# Altium PCB ClubNIKA.PcbDoc (part 2 of 3)
Units mm, origin at the board's own origin, x right, y up, seen from the top; angles counter-clockwise.
Board outline 246.38 x 165.73 mm, 2 copper layers (Top Layer, Bottom Layer); 346 components, 273 nets, 1174 pads, 422 vias.
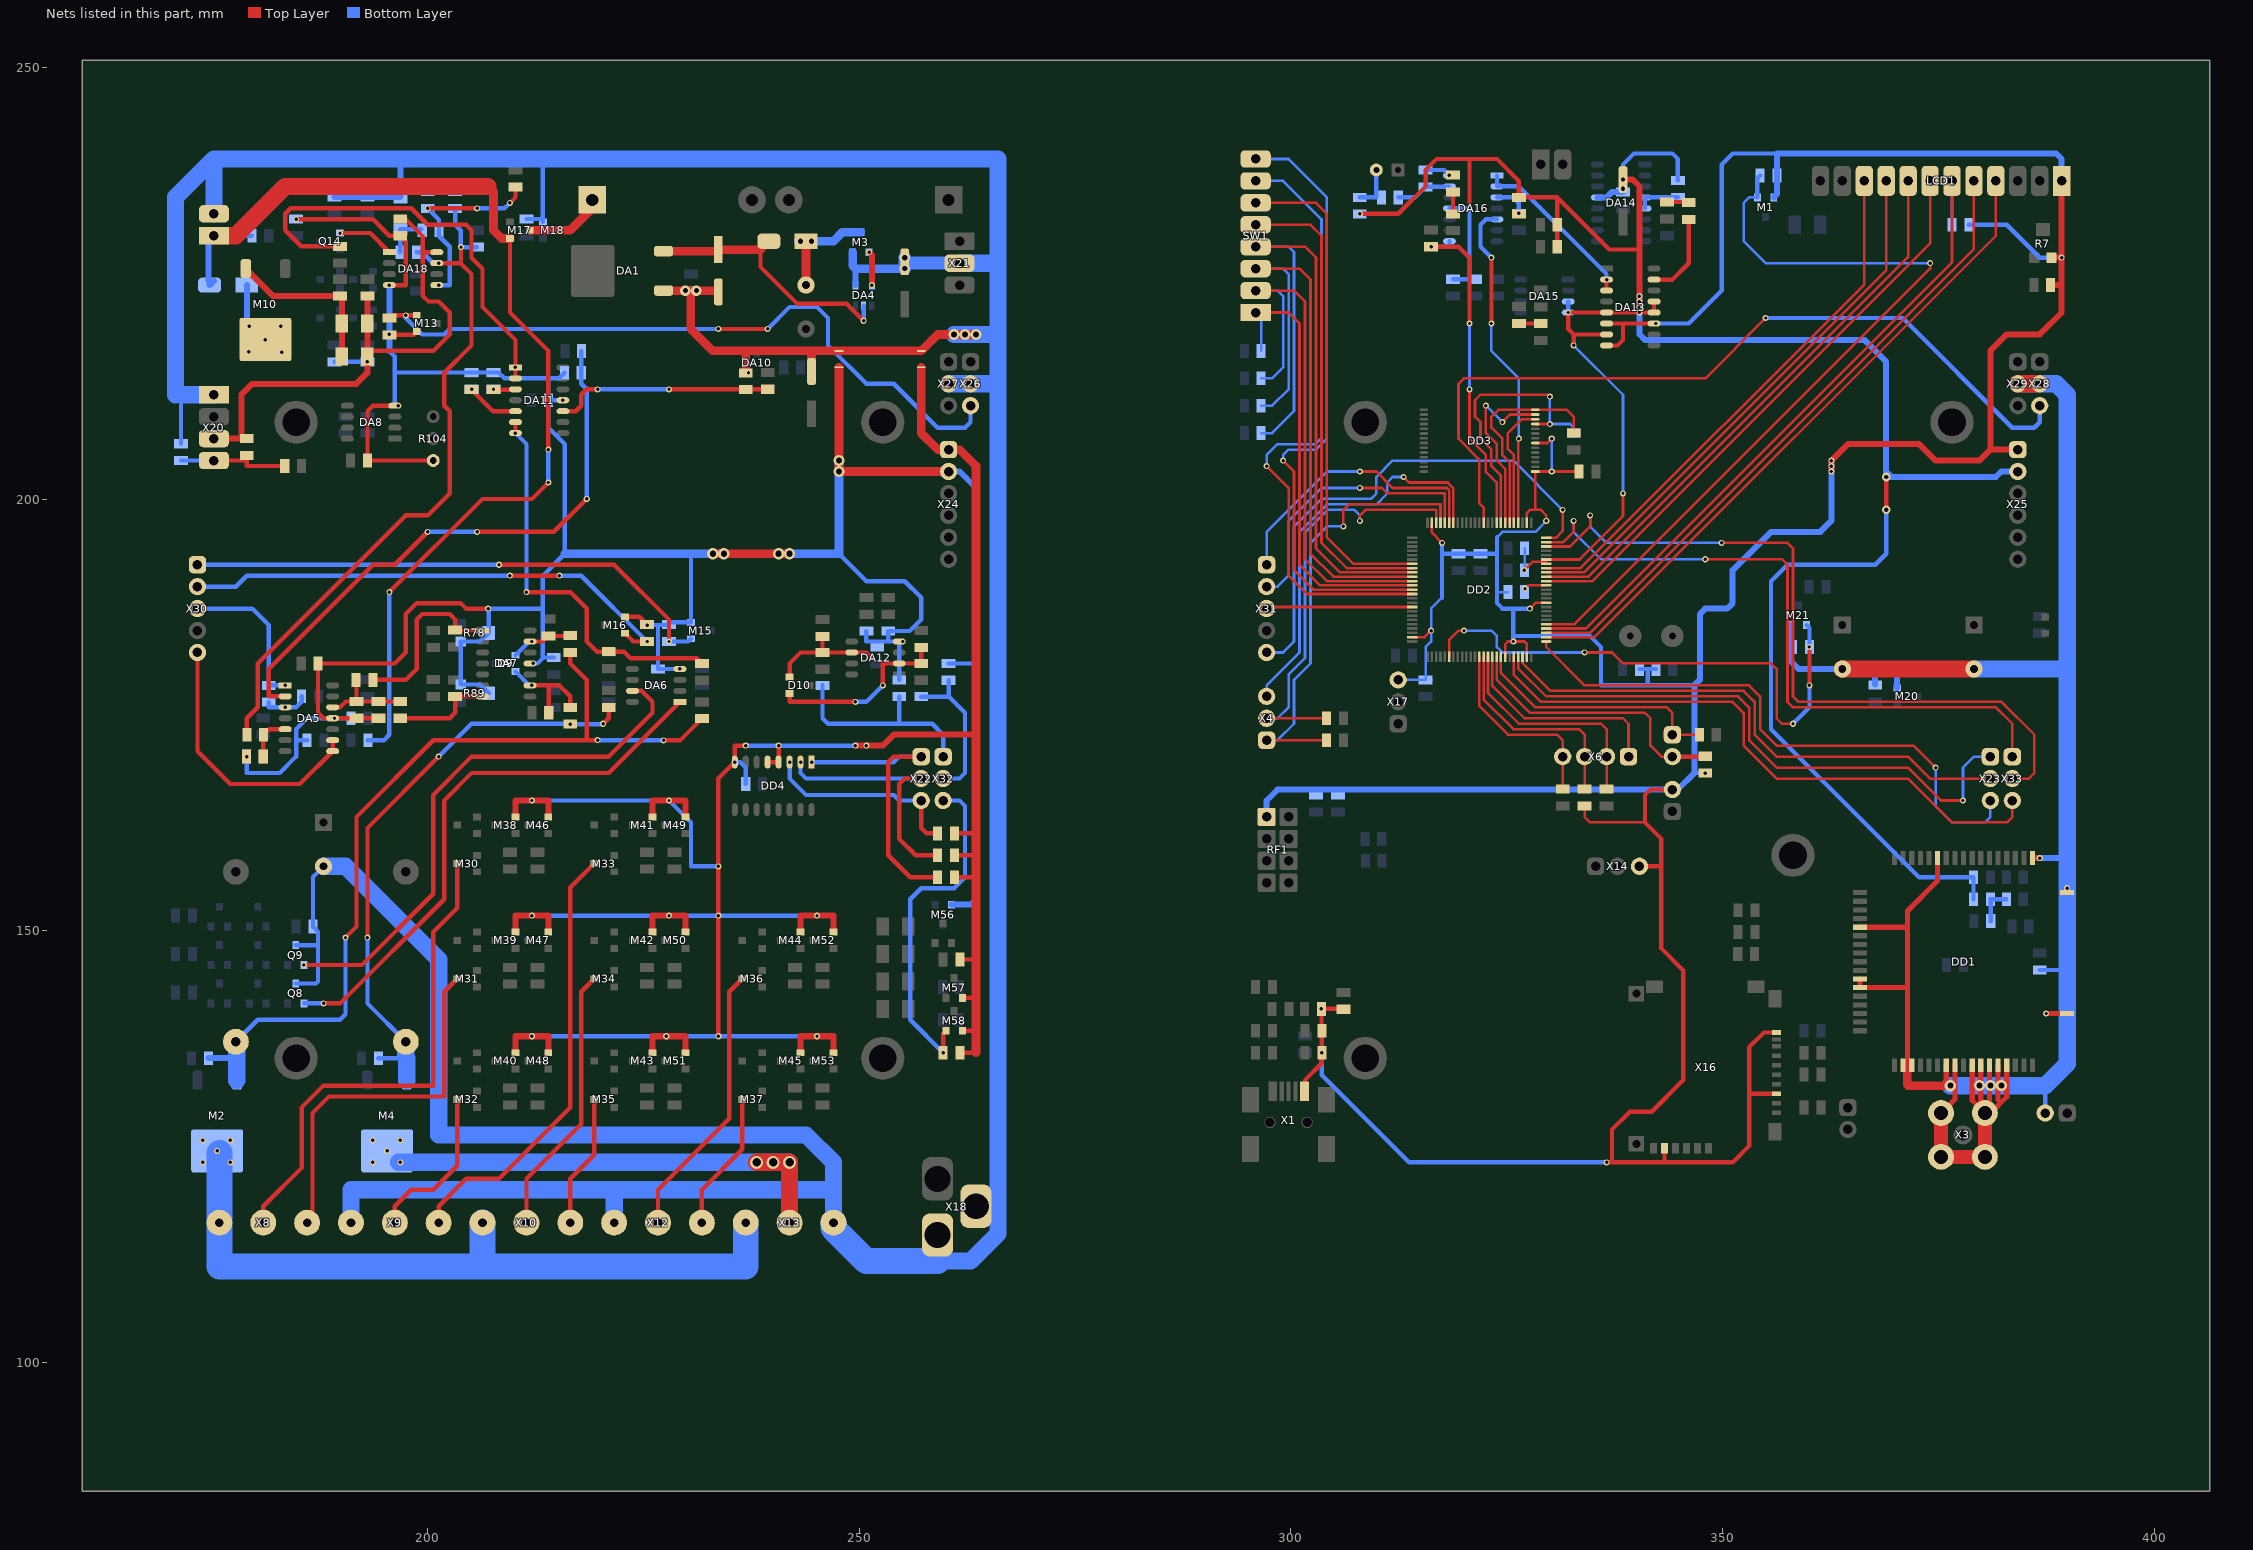
[diagram p2: the nets of this part, all layers, seen from the top]

## Via types
v1: diameter 0.7, hole 0.4, Top Layer to Bottom Layer, 390 vias
v2: diameter 1.3, hole 0.7, Top Layer to Bottom Layer, 15 vias
v3: diameter 1, hole 0.5, Top Layer to Bottom Layer, 6 vias
v4: diameter 1.2, hole 0.6, Top Layer to Bottom Layer, 6 vias
v5: diameter 1.5, hole 1, Top Layer to Bottom Layer, 3 vias
v6: diameter 1.4, hole 0.8, Top Layer to Bottom Layer, 2 vias

## Nets (pads, with @x,y where several pads share a name; then routed paths per layer and width w, separated by ;. In a path a pad name is that pad's centre, name@x,y a point inside that pad or via, vN(x,y) a via of type N, cw(c..) or ccw(c..) an arc to the next point about the centre after c; other vN are vias at no path point) (continued)
AGND_B1: C16.1 C19.1 C21.1 C22.1 C23.1 C27.1 C30.1 C31.1 C32.1 DA5.11 DA6.4 DA7.11 DA8.4 DA11.11 DA12.4 DA18.4 M13.2 M15.2 M16.2 M56.2 N1.2 R48.1 R53.1 R78.1 R78.3 R88.2 R89.2 R89.3 R90.2 R91.2 R103.2 R104.2 R107.1 R108.2 R117.2 R142.2 R144.2 R145.2 R178.2 R181.2 R215.2 X24.2 | length 373.5
  Top Layer w0.5: v1(184.785,232.41) 193.675,232.41 195.58,230.505 C19.1@196.85,230.505 197.485,229.87 197.485,224.79 DA18.4@195.948,224.79 ; C22.1@194.31,174.625 R53.1@191.77,174.625 DA5.11@189.015,174.625 187.96,174.625 187.325,175.26 C16.1@187.325,180.975 196.215,180.975 197.485,182.245 197.485,186.69 198.755,187.96 203.835,187.96 204.47,187.325 v1(207.01,187.325) ; R215.2@195.58,219.03 198.39,219.03 M13.2@198.755,219.395 ; DA8.4@196.215,210.82 193.675,210.82 193.04,210.185 C23.1@193.04,204.47 R104.2@200.66,204.47 ; M16.2@222.885,186.37 224.52,186.37 R91.2@225.425,185.465
  Top Layer w1: v2(233.045,193.675) v2(241.935,193.675) ; N1.2@247.65,215.265 v2(247.65,203.2) X24.2@260.35,203.2
  Bottom Layer w0.5: v1(179.07,170.18) 179.07,168.275 182.88,168.275 184.785,170.18 184.785,172.085 ; R107.1@186.055,172.085 184.785,172.085 ; R48.1@191.135,174.625 186.055,174.625 184.785,173.355 184.785,172.085 ; 195.58,217.17 196.215,216.535 196.215,210.83 ; 196.26,214.675 R142.2@205.105,214.675 R145.2@207.645,214.675 208.235,214.675 208.915,213.995 213.995,213.995 ; R89.3@207.085,177.53 206.085,178.53 R89.2@203.835,178.53 R78.1@203.835,183.515 206.085,183.515 R78.3@207.085,184.515 207.085,187.325 213.36,187.325 ; v1@212.247,180.975 212.725,180.975 213.36,181.61 213.36,191.135 215.9,193.675 215.9,206.375 213.995,208.28 C27.1@213.995,211.455 ; 213.405,181.655 R88.2@214.63,181.655 ; v1@215.628,211.455 C27.1@213.995,211.455 ; R144.2@215.855,214.63 215.22,213.995 213.995,213.995 ; v1(225.425,185.42) R90.2@227.965,185.42 ; 226.695,185.42 C21.1@226.695,180.34 v1(229.235,180.34) ; R90.2@228.235,185.735 M15.2@230.505,185.735 230.505,193.675 ; 247.65,193.675 250.825,190.5 255.27,190.5 257.175,188.595 257.175,186.055 255.86,184.74 R178.2@253.365,184.74 253.365,183.515 ; R181.2@250.825,184.74 250.825,183.515 253.365,183.515 ; C32.1@254.635,179.07 254.635,183.515 ; v1(255.02,183.515) 254.635,183.515 ; C31.1@260.35,180.975 263.525,180.975 ; C27.1@213.995,211.455 213.995,213.995 ; 253.365,183.515 254.635,183.515
  Bottom Layer w0.7: 195.58,217.17 v1(195.58,219.075) v1(195.58,224.79) ; X24.2@260.35,203.2 261.62,203.2 263.525,201.295 263.525,180.975 263.525,153.67 262.89,153.035 M56.2@260.665,153.035
  Bottom Layer w1: 215.9,193.675 230.505,193.675 v2(234.315,193.675) ; v2(240.665,193.675) 247.65,193.675 v2(247.65,204.47)
  other v1: 189.23,174.625 212.247,180.983 196.591,210.821 215.685,211.455
AGND_B2: C8.2 C9.2 C18.1 C34.2 C35.1 C36.2 C38.2 C40.1 C41.1 C45.1 DA13.5 DA13.7 DA13.12 DA13.13 DA14.13 DA15.3 DA15.4 DA16.11 DD2.19 DD2.20 R188.2 R202.2 R206.2 X25.2 | length 295.1
  Top Layer w0.3: v1(327.025,191.77) 328.02,192.765 329.565,192.765 ; DD2.20@329.565,193.015 333.422,193.015 338.455,198.048 v1(338.455,200.66)
  Top Layer w0.5: v1(307.975,233.045) 312.42,233.045 315.595,236.22 315.595,238.125 316.865,239.395 320.675,239.395 ; v1(320.675,233.68) 320.675,239.395 ; C40.1@330.835,229.235 C41.1@330.835,231.775 330.835,234.95 ; v1(332.74,217.805) 332.74,219.075 ; DA13.7@336.55,219.075 332.74,219.075 ; 340.36,228.917 336.868,228.917 330.835,234.95 ; DA13.13@342.05,222.885 DA13.12@342.05,221.615 v1(340.36,221.615) DA13.5@336.55,221.615 v1(332.105,221.615) 332.105,219.71 332.74,219.075 ; v3(368.935,198.755) v3(368.935,202.565) ; 320.675,239.395 323.85,239.395 326.39,236.855 C45.1@326.39,234.95 330.835,234.95
  Top Layer w0.7: v3(338.455,237.01) 339.57,237.01 340.36,236.22 340.36,228.917 v1(340.36,221.615)
  Bottom Layer w0.3: C8.2@327.07,191.815 C9.2@327.07,194.31 ; v1(332.74,217.805) 338.455,212.09 v1(338.455,200.66)
  Bottom Layer w0.5: DA16.11@318.35,233.68 v1(320.675,233.68) R202.2@320.675,225.47 ; C18.1@318.77,225.47 R202.2@320.675,225.47 ; R202.2@320.675,225.425 R202.2@320.675,225.47 ; v1(332.105,221.615) DA15.3@332.105,222.885 ; v3(338.455,237.01) 338.455,238.76 339.725,240.03 344.17,240.03 344.805,239.395 C36.2@344.805,236.9 ; v3(368.935,198.755) 368.935,193.675 367.665,192.405 357.505,192.405 355.6,190.5 355.6,173.355 372.745,156.21 C38.2@379.05,156.21 R188.2@379.05,153.67
  Bottom Layer w0.7: DA14.13@335.495,234.95 336.55,234.95 337.185,235.585 C35.1@338.455,235.585 v3(338.455,237.01) ; v1(340.36,223.52) v1(340.36,222.885) v1(340.36,222.25) v1(340.36,221.615) 340.36,219.075 340.995,218.44 366.395,218.44 368.935,215.9 368.935,203.2 ; X25.2@384.175,203.2 382.27,203.2 381.635,202.565 369.57,202.565 ; 368.935,203.2 v3(368.935,202.565) 369.57,202.565 ; 368.935,203.2 369.57,202.565
  other v3: 338.454,235.947
BAT_CHARGE_B1: M13.1 R215.1 X26.3 | length 80.9
  Top Layer w0.5: R215.1@195.58,220.98 195.895,221.295 v1(197.485,221.295) M13.1@198.755,221.295 ; v1(233.68,219.71) v1(239.395,219.71)
  Bottom Layer w0.5: v1(197.485,221.295) 197.485,220.98 199.39,219.075 201.93,219.075 202.565,219.71 v1(233.68,219.71) ; v1(239.395,219.71) 241.935,222.25 245.11,222.25 246.38,220.98 246.38,217.805 250.825,213.36 254,213.36 259.08,208.28 262.255,208.28 262.89,208.915 X26.3@262.89,210.82
BAT_CHARGE_B2: DD2.37 X28.3 | length 95.2
  Top Layer w0.3: DD2.37@322.315,197.265 322.315,199.02 321.797,199.538 321.797,204.618 319.405,207.01 319.405,213.36 320.04,213.995 347.98,213.995 v1(354.965,220.98)
  Bottom Layer w0.5: v1(354.965,220.98) 370.84,220.98 383.54,208.28 386.08,208.28 386.715,208.915 X28.3@386.715,210.82
BAT_SOCK_CMP_IN: DA18.5 R94.2 R95.2 R96.1 | length 23.2
  Top Layer w0.5: v1(200.025,233.68) v1(205.74,233.68) ; v1(209.55,234.315) 210.185,234.95 R94.2@210.185,236.175
  Bottom Layer w0.5: v1(200.025,233.68) 201.34,232.365 R95.2@201.34,231.14 201.295,231.095 201.295,230.505 202.565,229.235 202.565,224.79 v1(201.295,224.79) ; v1(205.74,233.68) 208.915,233.68 v1(209.55,234.315)
BAT_SOCK_CMP_OUT: DA18.7 R92.2 R93.1 R97.1 R102.1 | length 82.2
  Top Layer w0.5: R102.1@179.07,172.72 179.07,174.625 180.34,175.895 180.34,180.975 197.485,198.12 200.025,198.12 202.565,200.66 202.565,210.185 201.93,210.82 201.93,214.63 205.105,217.805 205.105,226.06 203.835,227.33 ; DA18.7@201.08,227.33 v1(201.295,227.33) 203.835,227.33 ; v1(203.88,229.19) 203.88,227.375 203.835,227.33
  Bottom Layer w0.5: R93.1@198.755,228.6 199.39,228.6 200.66,227.33 v1(201.295,227.33) ; R97.1@203.2,233.68 203.2,231.775 203.835,231.14 v1@203.835,229.19 ; v1(203.88,229.19) R92.2@205.74,229.19
BAT_VOLT_B1: DA5.8 DA5.9 X30.5 | length 31.5
  Top Layer w0.5: X30.5@173.355,182.245 173.355,170.815 177.165,167.005 185.205,167.005 DA5.8@189.015,170.815 DA5.9@189.015,172.085
BAT_VOLT_B2: DD2.25 X31.5 | length 59.5
  Top Layer w0.3: DD2.25@329.565,195.515 330.698,195.515 331.47,196.287 v1(331.47,198.755)
  Bottom Layer w0.3: X31.5@297.18,182.245 299.085,182.245 300.355,183.515 300.355,196.85 303.53,200.025 309.245,200.025 309.88,200.66 309.88,202.565 311.785,204.47 325.755,204.47 v1(331.47,198.755)
BATTERY: D5.2 M17.2 R100.2 R101.2 X19.1 | length 125.1
  Top Layer w0.5: v1(195.58,189.23) 206.375,200.025 212.09,200.025 v1(213.995,201.93) ; M17.2@209.55,230.19 209.55,221.615 213.995,217.17 v1(213.995,205.74)
  Top Layer w1: 207.01,236.22 207.645,235.585 207.645,231.14 208.595,230.19 M17.2@209.55,230.19
  Top Layer w2: X19.1@175.26,230.505 177.8,230.505 183.515,236.22 207.01,236.22
  Bottom Layer w0.5: X19.1@175.26,230.505 R101.2@179.66,230.505 ; R100.2@193.085,172.085 194.945,172.085 195.58,172.72 v1(195.58,189.23) ; v1(213.995,201.93) v1(213.995,205.74)
  Bottom Layer w0.7: D5.2@174.625,225.28 X19.1@174.625,230.505 ; D5.2@174.77,224.79 D5.2@175.26,225.28
CH1_IN: M30.3 X8.2 | length 58.3
  Top Layer w0.5: X8.2@180.975,116.205 180.975,118.11 185.42,122.555 185.42,129.54 187.96,132.08 200.66,132.08 200.66,149.86 203.44,152.64 M30.3@203.44,157.795
CH2_IN: M31.3 X8.3 | length 43.3
  Top Layer w0.5: X8.3@186.055,116.205 186.69,116.84 186.69,128.905 188.595,130.81 201.93,130.81 201.93,142.95 M31.3@203.44,144.46
CH3_IN: M32.3 X9.2 | length 18.8
  Top Layer w0.5: X9.2@196.215,116.205 196.215,118.11 198.12,120.015 200.66,120.015 203.44,122.795 M32.3@203.44,130.49
CH4_IN: M33.3 X9.3 | length 51.3
  Top Layer w0.5: X9.3@201.295,116.205 201.295,118.11 204.47,121.285 208.28,121.285 216.535,129.54 216.535,155.015 M33.3@219.315,157.795
CH5_IN: M34.3 X10.2 | length 31.5
  Top Layer w0.5: X10.2@211.455,116.205 211.455,121.285 217.805,127.635 217.805,142.95 M34.3@219.315,144.46
CH6_IN: M35.3 X10.3 | length 15.4
  Top Layer w0.5: X10.3@216.535,116.205 216.535,121.285 219.315,124.065 M35.3@219.315,130.49
CH7_IN: M36.3 X12.2 | length 32.3
  Top Layer w0.5: X12.2@226.695,116.205 226.695,120.015 234.95,128.27 234.95,142.95 M36.3@236.46,144.46
CH8_IN: M37.3 X12.3 | length 16.2
  Top Layer w0.5: X12.3@231.775,116.205 231.775,120.015 236.46,124.7 M37.3@236.46,130.49
CH_CUR_SINK_B1: C31.2 R182.2 X32.2 | length 17.5
  Bottom Layer w0.5: R182.2@257.175,177.12 260.395,177.12 262.255,175.26 262.255,168.275 261.62,167.64 X32.2@259.715,167.64 ; 260.35,177.165 C31.2@260.35,179.025
CH_CUR_SINK_B2: DD2.23 X33.2 | length 87.3
  Top Layer w0.3: DD2.23@329.565,194.515 332.31,194.515 334.645,196.85 v1(334.645,198.12) ; v1(349.885,194.945) 357.505,194.945 358.14,194.31 358.14,177.165 358.775,176.53 382.27,176.53 386.08,172.72 386.08,168.275 385.445,167.64 X33.2@383.54,167.64
  Bottom Layer w0.3: v1(334.645,198.12) 334.645,196.85 336.55,194.945 v1(349.885,194.945)
CH_CUR_SRC_B1: C32.2 R183.1 X32.1 | length 24.2
  Bottom Layer w0.5: R183.1@245.745,178.435 245.745,174.625 246.38,173.99 254.635,173.99 ; C32.2@254.635,177.12 254.635,173.99 ; X32.1@259.715,170.18 259.715,172.72 258.445,173.99 254.635,173.99
CH_CUR_SRC_B2: DD2.24 X33.1 | length 79.3
  Top Layer w0.3: DD2.24@329.565,195.015 331.54,195.015 332.74,196.215 v1(332.74,197.485) ; v1(347.98,193.04) 356.87,193.04 357.505,192.405 357.505,176.53 358.14,175.895 381.635,175.895 383.54,173.99 X33.1@383.54,170.18
  Bottom Layer w0.3: v1(332.74,197.485) 332.74,196.215 335.915,193.04 v1(347.98,193.04)
CH_DIR_B1: M58.1 R180.1 X32.3 | length 40.5
  Top Layer w0.5: v1(259.715,135.89) 259.715,138.11 M58.1@260.035,138.43
  Bottom Layer w0.5: v1(259.715,135.89) 255.905,139.7 255.905,153.67 257.175,154.94 260.985,154.94 262.255,156.21 262.255,164.465 261.62,165.1 X32.3@259.715,165.1
CH_DIR_B2: DD2.96 X33.3 | length 71.3
  Top Layer w0.3: DD2.96@325.815,181.765 325.815,179.645 328.93,176.53 351.155,176.53 352.425,175.26 352.425,171.45 356.235,167.64 371.475,167.64 376.555,162.56 382.905,162.56 383.54,163.195 X33.3@383.54,165.1
CH_SEL0_B1: DD4.1 R163.1 X22.1 | length 34.6
  Top Layer w0.5: X22.1@257.175,170.18 254,170.18 253.365,169.545 253.365,158.75 255.905,156.21 R163.1@259.08,156.21
  Bottom Layer w0.5: v1(244.475,169.545) 254,169.545 254.635,170.18 X22.1@257.175,170.18
CH_SEL0_B2: DD2.97 X23.1 | length 68.9
  Top Layer w0.3: DD2.97@326.315,181.765 326.315,180.415 329.565,177.165 351.79,177.165 353.06,175.895 353.06,172.085 356.235,168.91 371.475,168.91 375.285,165.1 v1(377.825,165.1)
  Bottom Layer w0.3: v1(377.825,165.1) 377.825,168.91 379.095,170.18 X23.1@381,170.18
CH_SEL1_B1: DD4.2 R164.1 X22.2 | length 29.9
  Top Layer w0.5: X22.2@257.175,167.64 255.27,167.64 254.635,167.005 254.635,160.655 256.54,158.75 R164.1@259.08,158.75
  Bottom Layer w0.5: v1(243.205,169.545) 243.205,168.275 243.84,167.64 X22.2@257.175,167.64
CH_SEL1_B2: DD2.98 X23.2 | length 62.7
  Top Layer w0.3: DD2.98@326.815,181.765 326.815,181.02 330.035,177.8 352.425,177.8 353.695,176.53 353.695,172.72 356.235,170.18 371.475,170.18 374.015,167.64 X23.2@381,167.64
CH_SEL2_B1: DD4.3 R165.1 X22.3 | length 23.5
  Top Layer w0.5: X22.3@257.175,165.1 257.175,161.925 257.81,161.29 R165.1@259.08,161.29
  Bottom Layer w0.5: v1(241.935,169.545) 241.935,167.64 243.84,165.735 254,165.735 254.635,165.1 X22.3@257.175,165.1
CH_SEL2_B2: DD2.1 X23.3 | length 67.5
  Top Layer w0.3: DD2.1@329.565,183.515 329.565,182.88 334.01,178.435 353.06,178.435 354.33,177.165 354.33,173.355 356.235,171.45 372.11,171.45 v1(374.65,168.91)
  Bottom Layer w0.3: v1(374.65,168.91) 374.65,164.465 376.555,162.56 380.365,162.56 381,163.195 X23.3@381,165.1
CHG_I: DA11.3 R137.2 R145.1 | length 2.5
  Top Layer w0.5: R137.2@207.645,212.68 DA11.3@210.14,212.68
  other v1: 207.645,212.725
CHG_I_BUF: DA11.1 DA11.2 R214.2 | length 51.2
  Top Layer w0.5: R214.2@189.865,229.28 185.375,229.28 183.515,231.14 183.515,233.045 184.15,233.68 198.12,233.68 200.025,231.775 204.47,231.775 205.105,231.14 205.105,227.965 206.375,226.695 206.375,222.25 210.185,218.44 v1(210.185,215.265) DA11.2@210.185,213.995
CHG_I_CTR: DA18.1 Q14.1 | length 6.6
  Top Layer w0.5: v1(189.865,230.82) 193.36,230.82 DA18.1@195.58,228.6
CHG_I_MSR_MN: M10.2 R70.2 R84.2 R212.1 | length 19.3
  Top Layer w0.7: M10.2@178.955,226.695 182.13,223.52 R212.1@189.865,223.52 190.09,223.295 R84.2@190.09,220.345 R70.2@190.09,216.535
CHG_V: C19.2 DA18.8 R70.1 R72.1 R73.1 R84.1 R110.1 R211.1 X20.3 | length 64.1
  Top Layer w0.5: R70.1@193.04,217.17 200.66,217.17 202.565,219.075 202.565,221.615 201.295,222.885 200.115,222.885 199.435,223.565 199.435,228.6 ; C19.2@196.85,232.455 197.44,232.455 199.435,230.46 199.435,228.6 ; DA18.8@201.08,228.6 199.435,228.6
  Top Layer w0.7: X20.3@175.26,207.01 178.435,207.01 178.435,212.09 179.705,213.36 191.77,213.36 193.04,214.63 v1(193.04,215.9) R70.1@193.04,216.535 ; R70.1@193.04,217.17 R84.1@193.04,220.345 R211.1@193.04,223.52
  Bottom Layer w0.5: R73.1@189.23,215.9 R72.1@192.405,215.9
CHG_V_ADJ: R110.2 R111.2 R120.1 X20.4 | length 13.8
  Top Layer w0.5: X20.4@175.26,204.47 179.07,204.47 R110.2@179.07,205.06 179.07,203.835 R111.2@183.47,203.835
  Bottom Layer w0.5: R120.1@171.45,204.47 X20.4@175.26,204.47
DCHG_SIM900_CAP: DD2.81 M21.1 R127.1 | length 63.1
  Top Layer w0.3: DD2.81@318.315,181.765 318.315,183.695 319.392,184.772 v1(320.04,184.772) ; v1(334.01,182.245) 337.185,182.245 338.455,180.975 355.6,180.975 356.235,180.34 356.235,174.625 356.87,173.99 v1(358.14,173.99)
  Top Layer w0.5: v1(360.045,178.435) v1(360.045,182.88)
  Bottom Layer w0.3: v1(320.04,184.772) 323.228,184.772 323.85,184.15 323.85,182.88 324.485,182.245 v1(334.01,182.245)
  Bottom Layer w0.5: v1(358.14,173.99) 360.045,175.895 v1(360.045,178.435) ; M21.1@359.725,185.42 360.045,185.1 v1(360.045,182.88)
DGND_B1: C29.1 DD4.4 DD4.5 DD4.8 M38.2 M39.2 M40.2 M41.2 M42.2 M43.2 M44.2 M45.2 M46.2 M47.2 M48.2 M49.2 M50.2 M51.2 M52.2 M53.2 M57.2 M58.2 N2.2 R163.2 R164.2 R165.2 R175.2 R180.2 X24.1 | length 322.8
  Top Layer w0.5: v1(233.68,137.795) v1(233.68,151.765) v1(233.68,157.48) 233.68,167.64 DD4.8@235.392,169.352 ; DD4.8@235.585,169.942 235.585,171.45 v1(236.855,171.45) ; DD4.5@239.395,169.545 DD4.4@240.665,169.545 v1(240.665,171.45) ; R163.2@261.03,156.21 263.525,156.21 ; R164.2@261.03,158.75 263.525,158.75 ; R165.2@261.03,161.29 263.525,161.29 ; R180.2@261.665,135.89 263.525,135.89 ; R175.2@261.665,146.685 263.525,146.685 ; M58.2@261.935,138.43 263.525,138.43 ; M57.2@261.935,142.24 263.525,142.24
  Top Layer w0.7: M40.2@210.185,135.885 210.185,137.795 213.995,137.795 M48.2@213.995,135.885 ; M39.2@210.185,149.855 210.185,151.765 v1(212.09,151.765) 213.995,151.765 M47.2@213.995,149.855 ; M38.2@210.185,163.19 210.185,165.1 v1(212.09,165.1) 213.995,165.1 M46.2@213.995,163.19 ; M43.2@226.06,135.885 226.06,137.795 229.87,137.795 M51.2@229.87,135.885 ; M42.2@226.06,149.855 226.06,151.765 v1(227.965,151.765) 229.87,151.765 M50.2@229.87,149.855 ; M41.2@226.06,163.19 226.06,165.1 v1(227.965,165.1) 229.87,165.1 M49.2@229.87,163.19 ; M45.2@243.205,135.885 243.205,137.795 247.015,137.795 M53.2@247.015,135.885 ; M44.2@243.205,149.855 243.205,151.765 v1(245.11,151.765) 247.015,151.765 M52.2@247.015,149.855 ; v1(249.555,171.45) v1(250.825,171.45) 252.73,171.45 254,172.72 263.525,172.72
  Top Layer w1: N2.2@257.175,215.265 257.175,207.645 259.08,205.74 X24.1@260.35,205.74 261.62,205.74 263.525,203.835 263.525,172.72 263.525,161.29 263.525,158.75 263.525,156.21 263.525,146.685 263.525,142.24 263.525,138.43 263.525,135.89
  Bottom Layer w0.5: v1(212.09,137.795) v1(245.11,137.795) ; v1(212.09,151.765) v1(227.965,151.765) v1(245.11,151.765) ; v1(212.09,165.1) v1(227.965,165.1) 230.505,162.56 230.505,157.48 v1(233.68,157.48) ; v1(235.584,169.545) 236.22,169.545 236.855,168.91 C29.1@236.855,167.005 ; v1(236.855,171.45) v1(240.665,171.45) v1(250.825,171.45)
  other v1: 227.647,137.795
DGND_B2: C1.1 C2.1 C3.1 C4.1 C5.1 C6.1 C7.1 C10.1 C11.1 C12.1 C20.1 DA13.6 DA13.8 DA13.11 DD2.10 DD2.27 DD2.49 DD2.74 DD2.94 DD2.99 DD3.1 DD3.7 LCD1.GND M1.2 R7.2 R8.2 R9.2 R10.2 R11.2 R12.2 R19.1 R20.1 R32.1 RF1.1 X1.GND X11.2 X14.3 X16.SD_GND X16.SD_PRES1 X16.SIM_GND X17.3 X25.1 | length 525.7
  Top Layer w0.3: DD2.74@314.065,184.015 315.46,184.015 v1(316.23,184.785) ; DD2.49@316.315,197.265 316.315,196.13 v1(317.5,194.945) ; DD2.94@324.815,181.765 324.815,183.21 325.12,183.515 v1(325.755,183.515) 327.025,183.515 327.315,183.225 DD2.99@327.315,181.765 ; DD2.27@327.315,197.265 327.315,198.41 327.66,198.755 328.295,198.755 ; v1(327.66,187.325) 328.35,188.015 DD2.10@329.565,188.015 ; DD3.7@328.295,206.5 329.69,206.5 v1(330.2,207.01) ; v1(329.565,197.485) 329.565,198.12 328.93,198.755 328.295,198.755 ; C10.1@333.375,203.2 v1(330.2,203.2) DD3.1@328.295,203.2 328.295,198.755 ; R20.1@334.01,164.465 334.01,163.195 334.645,162.56 340.995,162.56
  Top Layer w0.5: X1.GND@301.57,131.445 301.625,131.5 301.625,132.715 303.575,134.665 v1(303.575,135.89) R10.2@303.575,138.43 ; R10.2@303.53,138.475 v1(303.53,140.97) R9.2@306.025,140.97 ; v1(336.55,123.19) 337.185,123.19 ; DA13.8@336.55,217.805 337.82,217.805 338.455,218.44 338.455,220.345 ; DA13.6@336.55,220.345 338.455,220.345 ; X14.3@340.36,157.48 342.9,157.48 ; DA13.11@342.05,220.345 338.455,220.345 ; X16.SIM_GND@343.255,124.83 343.255,123.47 343.535,123.19 ; X11.2@344.17,166.37 341.63,166.37 340.995,165.735 340.995,162.56 342.9,160.655 342.9,157.48 ; 353.06,131.445 353.375,131.13 X16.SD_GND@356.235,131.13 ; X16.SD_PRES1@356.235,138.23 354.765,138.23 353.06,136.525 353.06,125.095 351.155,123.19 343.535,123.19 ; 337.185,123.19 343.535,123.19 ; 337.185,123.19 337.185,127 339.249,129.064 341.789,129.064 345.44,132.715 345.44,145.415 342.9,147.955 342.9,157.48
  Top Layer w0.7: v1(362.585,203.2) v1(362.585,204.47) 364.49,206.375 372.745,206.375 374.65,204.47 379.73,204.47 381,205.74 ; X25.1@384.175,205.74 381,205.74 ; C1.1@387.985,224.79 389.255,224.79 ; R7.2@388.08,227.965 v1(389.255,227.965) ; LCD1.GND@389.255,236.855 v1(389.255,227.965) ; 381,205.74 381,217.17 382.905,219.075 386.715,219.075 389.255,221.615 389.255,224.79 ; 389.255,224.79 v1(389.255,227.965)
  Bottom Layer w0.3: X17.3@312.42,179.07 R32.1@315.595,179.07 315.595,182.88 316.23,183.515 v1(316.23,184.785) 316.23,187.325 317.5,188.595 ; 323.85,189.23 C7.1@325.12,189.23 ; 323.85,195.58 324.485,196.215 328.295,196.215 v1(329.565,197.485) ; v1(330.2,203.2) v1(330.2,207.01)
  Bottom Layer w0.5: v1(303.575,135.89) 303.575,133.305 313.69,123.19 v1(336.55,123.19) ; 317.5,188.595 v1(317.5,194.945) ; 317.5,193.675 323.85,193.675 ; 323.85,195.58 323.85,193.675 ; v1(325.755,183.515) 325.755,187.325 ; 325.755,184.15 334.645,184.15 335.915,182.88 335.915,178.435 341.312,178.435 ; v1(327.66,187.325) 325.755,187.325 ; C5.1@340.36,180.34 341.312,180.34 ; C6.1@342.265,180.34 341.312,180.34 ; v1(342.265,220.345) 346.075,220.345 349.885,224.155 349.885,238.76 351.155,240.03 356.28,240.03 ; X11.2@344.17,166.37 X11.2@344.805,166.37 ; 346.71,168.275 v1(347.98,168.275) ; 346.71,178.435 341.312,178.435 ; R8.2@378.505,231.775 382.905,231.775 386.715,227.965 v1(389.255,227.965) ; 323.85,193.675 323.85,189.23 323.85,187.96 324.485,187.325 325.755,187.325 ; 341.312,178.435 341.312,180.34
  Bottom Layer w0.7: RF1.1@297.18,163.195 297.18,165.1 298.45,166.37 X11.2@344.17,166.37 ; X11.2@344.805,166.37 346.71,168.275 346.71,178.435 347.345,179.07 347.345,186.69 347.98,187.325 350.52,187.325 351.155,187.96 351.155,191.77 355.6,196.215 361.315,196.215 362.585,197.485 v1(362.585,204.47) ; M1.2@355.915,234.95 356.28,235.315 R12.2@356.28,237.49 356.28,240.03 388.62,240.03 389.255,239.395 LCD1.GND@389.255,236.855
  other v1: 362.585,203.835
EXT1_I_CTR: DA6.1 Q8.1 | length 64.7
  Top Layer w0.5: v1(187.96,141.605) 189.865,141.605 201.93,153.67 201.93,165.1 205.105,168.275 220.98,168.275 DA6.1@229.235,176.53
  Bottom Layer w0.5: Q8.1@185.69,141.605 v1(187.96,141.605)
EXT1_I_MSR: DA7.1 R55.1 R77.2 | length 20.7
  Top Layer w0.5: R55.1@193.675,179.07 197.485,179.07 198.755,180.34 198.755,186.055 199.39,186.69 202.565,186.69 203.2,186.055 R77.2@203.2,184.83 ; R77.2@203.2,184.785 DA7.1@206.375,184.785
EXT1_I_MSR_MN: M2.2 R44.1 R45.1 R67.2 R79.1 | length 100.7
  Top Layer w0.5: v1(190.5,149.225) 191.77,150.495 191.77,163.195 200.66,172.085 218.44,172.085 ; R79.1@216.535,182.245 216.535,180.975 218.44,179.07 218.44,172.085 ; v1(219.71,172.085) 218.44,172.085 ; v1(227.352,172.063) 229.258,172.063 R67.2@231.775,174.58
  Bottom Layer w0.5: R44.1@177.8,137.16 180.34,139.7 189.865,139.7 190.5,140.335 v1(190.5,149.225) ; v1(219.71,172.085) 219.732,172.063 v1(227.352,172.063)
  Bottom Layer w0.7: R45.1@174.625,135.255 177.915,135.255
  Bottom Layer w2: M2.2@177.915,132.715 177.915,135.255 R44.1@177.915,137.045
EXT2_I_CTR: DA6.7 Q9.1 | length 63.3
  Top Layer w0.5: v1(185.69,146.05) 192.405,146.05 200.66,154.305 200.66,165.735 205.105,170.18 220.98,170.18 226.06,175.26 226.06,176.53 224.79,177.8 DA6.7@223.735,177.8
EXT2_I_MSR: DA7.7 R52.1 R112.2 | length 11.6
  Top Layer w0.5: R52.1@196.85,174.625 202.565,174.625 203.2,175.26 R112.2@203.2,177.12 ; R112.2@203.2,177.165 DA7.7@206.375,177.165
EXT2_I_MSR_MN: M4.2 R51.1 R54.1 R58.2 R105.2 | length 68.9
  Top Layer w0.5: v1(193.04,149.225) 193.04,161.925 v1(201.295,170.18) ; v1(220.345,173.99) 220.98,174.625 R58.2@220.98,175.895
  Bottom Layer w0.5: v1(193.04,149.225) 193.04,141.605 R51.1@197.485,137.16 ; R54.1@194.31,135.255 197.6,135.255 ; v1(201.295,170.18) 205.105,173.99 v1@216.535,173.99 ; v1(216.535,173.945) v1@220.345,173.945
  Bottom Layer w2: R51.1@197.485,137.16 197.485,135.37 197.6,135.255 M4.2@197.6,132.715
EXT_12V_CH1: M2.3 X8.1 X10.1 X13.1 | length 84.3
  Bottom Layer w3: M2.3@175.895,124.255 X8.1@175.895,116.205 175.895,111.125 206.375,111.125 ; X10.1@206.375,116.205 206.375,111.125 ; X13.1@236.855,116.205 236.855,111.125 206.375,111.125
  other v1: 173.99,123.19 177.165,123.19 175.635,124.515 173.99,125.73 177.165,125.73
EXT_12V_CH1_KEY_B1: M15.1 R90.1 X30.1 | length 62.5
  Top Layer w0.5: v1(208.28,192.405) 221.615,192.405 227.965,186.055 v1(227.965,183.515)
  Bottom Layer w0.5: X30.1@173.355,192.405 v1(208.28,192.405) ; v1(227.965,183.515) 230.185,183.515 M15.1@230.505,183.835
EXT_12V_CH1_KEY_B2: DD2.45 X31.1 | length 32.5
  Top Layer w0.3: v1(307.975,203.2) 309.88,203.2 311.785,201.295 318.063,201.295 318.315,201.043 DD2.45@318.315,197.265
  Bottom Layer w0.3: X31.1@297.18,192.405 297.18,196.215 304.165,203.2 v1(307.975,203.2)
EXT_12V_CH2: M4.3 X13.2 | length 56.1
  Top Layer w2: v5(238.125,123.19) v5(241.935,123.19) X13.2@241.935,116.205
  Bottom Layer w2: M4.3@196.645,123.19 v5(241.935,123.19)
  other v1: 193.675,123.19 196.85,123.19 195.32,124.515 193.675,125.73 196.85,125.73
  other v5: 240.03,123.19
EXT_12V_CH2_KEY_B1: M16.1 R91.1 X30.2 | length 58.7
  Top Layer w0.5: v1(209.55,191.135) v1(215.265,191.135) ; M16.1@222.885,184.47 223.84,183.515 v1(225.425,183.515)
  Bottom Layer w0.5: X30.2@173.355,189.865 177.8,189.865 179.07,191.135 v1(209.55,191.135) ; v1(215.265,191.135) 217.805,191.135 v1(225.425,183.515)
EXT_12V_CH2_KEY_B2: DD2.46 X31.2 | length 32.7
  Top Layer w0.3: v1(307.975,201.295) 310.515,201.295 311.15,200.66 317.815,200.66 DD2.46@317.815,197.265
  Bottom Layer w0.3: X31.2@297.18,189.865 298.45,189.865 299.72,191.135 299.72,197.485 303.53,201.295 v1(307.975,201.295)
EXT_12V_OVERCUR_B1: DA5.1 R46.1 X30.3 | length 17.9
  Bottom Layer w0.5: X30.3@173.355,187.325 179.705,187.325 181.61,185.42 R46.1@181.61,178.435 v1(183.515,178.435)
EXT_12V_OVERCUR_B2: DD2.67 X31.3 | length 17
  Top Layer w0.3: X31.3@297.18,187.325 297.37,187.515 DD2.67@314.065,187.515
EXT_I2C_SCL: DD2.92 R19.2 X7.2 | length 32.6
  Top Layer w0.3: DD2.92@323.815,181.765 323.815,179.105 327.66,175.26 340.995,175.26 341.63,174.625 341.63,171.45 342.9,170.18 343.535,170.18 X7.2@344.17,170.815
  Top Layer w0.5: X7.2@344.17,170.18 R19.2@347.935,170.18
EXT_I2C_SDA: DD2.93 R18.2 X7.1 | length 29.3
  Top Layer w0.3: DD2.93@324.315,181.765 324.315,179.875 328.295,175.895 343.535,175.895 344.17,175.26 X7.1@344.17,172.72 R18.2@347.3,172.72
EXT_I_CLIP: DA11.5 R138.2 R142.1 | length 6.1
  Top Layer w0.5: R138.2@205.105,212.68 207.6,210.185 DA11.5@210.185,210.185
  other v1: 205.105,212.725
EXT_I_CLIP_BUF: DA11.6 DA11.7 R60.2 R65.1 | length 46.2
  Top Layer w0.5: v1(210.185,207.645) DA11.6@210.185,208.915 ; v1(211.455,189.23) 216.535,189.23 218.44,187.325 218.44,183.515 219.62,182.335 R60.2@220.98,182.335 222.75,182.335 223.52,181.565 231.185,181.565 R65.1@231.775,180.975
  Bottom Layer w0.5: v1(210.185,207.645) 211.455,206.375 v1(211.455,189.23)
EXT_I_TRIG: DA5.2 R136.2 R144.1 | length 67.4
  Top Layer w0.5: DA5.2@183.515,177.165 181.61,177.165 181.61,180.34 193.675,192.405 196.215,192.405 v1(200.025,196.215) ; v1(205.74,196.215) 214.63,196.215 v1(218.44,200.025)
  Bottom Layer w0.5: v1(200.025,196.215) v1(205.74,196.215) ; R136.2@217.805,217.125 R144.1@217.805,214.63 217.805,213.36 218.44,212.725 v1(218.44,200.025)
EXT_SPI_CS: DD2.88 R16.2 X6.4 | length 22.7
  Top Layer w0.3: DD2.88@321.815,181.765 321.815,176.025 325.12,172.72 330.835,172.72 331.47,172.085 X6.4@331.47,170.18 R16.2@331.47,166.415
EXT_SPI_MISO: DD2.90 R17.2 X6.2 | length 26.6
  Top Layer w0.3: DD2.90@322.815,181.765 322.815,177.565 326.39,173.99 335.915,173.99 336.55,173.355 X6.2@336.55,170.18 R17.2@336.55,166.415
EXT_SPI_MOSI: DD2.91 X6.1 | length 24.8
  Top Layer w0.3: DD2.91@323.315,181.765 323.315,178.335 327.025,174.625 338.455,174.625 339.09,173.99 X6.1@339.09,170.18
EXT_SPI_SCK: DD2.89 R20.2 X6.3 | length 24.7
  Top Layer w0.3: DD2.89@322.315,181.765 322.315,176.795 325.755,173.355 333.375,173.355 334.01,172.72 X6.3@334.01,170.18 R20.2@334.01,166.415
EXT_UART_IO: DD2.44 X4.3 | length 46.4
  Top Layer w0.3: v1(313.055,202.565) 313.69,201.93 318.135,201.93 318.815,201.25 DD2.44@318.815,197.265
  Bottom Layer w0.3: X4.3@297.18,177.165 297.18,178.435 300.99,182.245 300.99,196.215 304.165,199.39 309.88,199.39 311.15,200.66 311.15,201.93 311.785,202.565 v1(313.055,202.565)
EXT_UART_RX: DD2.48 R21.2 X4.2 | length 50.6
  Top Layer w0.3: X4.2@297.18,174.625 R21.2@304.12,174.625 ; v1(307.975,197.485) 307.975,198.12 308.61,198.755 316.765,198.755 316.815,198.705 DD2.48@316.815,197.265
  Bottom Layer w0.3: X4.2@297.18,174.625 298.45,174.625 299.72,175.895 299.72,179.705 301.625,181.61 301.625,196.143 304.237,198.755 307.34,198.755 307.975,198.12 v1(307.975,197.485)
EXT_UART_TX: DD2.47 R22.2 X4.1 | length 52.8
  Top Layer w0.3: X4.1@297.18,172.085 R22.2@304.12,172.085 ; v1(306.07,196.85) 306.07,198.755 306.705,199.39 317.315,199.39 DD2.47@317.315,197.265
  Bottom Layer w0.3: X4.1@297.18,172.085 298.45,172.085 300.355,173.99 300.355,179.07 302.26,180.975 302.26,194.945 304.165,196.85 v1(306.07,196.85)
FLASH_MISO: DD2.31 DD3.14 R40.1 | length 25.2
  Top Layer w0.3: DD2.31@325.315,197.265 325.315,204.275 324.485,205.105 324.485,207.01 323.215,208.28 323.215,209.55 324.015,210.35 DD3.14@328.295,210.35 331.94,210.35 332.74,209.55 R40.1@332.74,207.645
FLASH_MOSI: DD2.32 DD3.13 | length 21.4
  Top Layer w0.3: v1(322.58,210.82) 322.58,207.645 323.85,206.375 323.85,204.47 324.815,203.505 DD2.32@324.815,197.265 ; v1(324.485,208.915) 325.37,209.8 DD3.13@328.295,209.8
  Bottom Layer w0.3: v1(322.58,210.82) v1(324.485,208.915)
FLASH_SCK: DD2.30 DD3.12 | length 14.5
  Top Layer w0.3: DD2.30@325.815,197.265 325.815,205.105 325.12,205.8 325.12,207.645 326.725,209.25 DD3.12@328.295,209.25
FLSH_CS: DD2.33 DD3.11 R41.1 | length 32.9
  Top Layer w0.3: DD2.33@324.315,197.265 324.315,202.735 323.215,203.835 323.215,205.74 321.945,207.01 321.945,208.915 321.31,209.55 321.31,211.455 321.945,212.09 329.77,212.09 v1(329.985,211.875) ; DD3.11@328.295,208.7 v1(329.985,208.7)
  Bottom Layer w0.3: v1(329.985,211.875) v1(329.985,208.7) 332.32,208.7 332.74,208.28 R41.1@332.74,207.645
HVGND_B1: C13.2 C14.2 C15.2 C17.2 C28.1 D8.1 DA1.gnd DA4.4 DA10.2 M3.2 M18.2 N1.1 N2.1 Q8.3 Q9.3 R50.2 R68.2 R85.2 R96.2 R97.2 R99.2 R120.2 R210.2 X9.1 X12.1 X13.3 X18.- X18.PRES X19.2 X20.1 X21.2 X26.2 X27.2 | length 571.3
  Top Layer w1: DA1.gnd@227.33,224.155 v4(229.862,224.155) 230.497,224.155 ; C13.2@233.525,224.155 230.497,224.155 ; C28.1@236.855,214.63 236.855,217.17 ; C14.2@244.475,214.785 244.475,217.17 ; v2(263.525,219.075) 259.08,219.075 N2.1@257.175,217.17 N1.1@247.65,217.17 244.475,217.17 ; 230.497,224.155 230.497,219.718 233.045,217.17 236.855,217.17 ; 236.855,217.17 244.475,217.17
  Bottom Layer w0.5: R120.2@171.45,206.42 171.45,212.09 ; Q8.3@184.74,143.905 187.085,143.905 187.325,144.145 187.325,148.35 ; Q9.3@184.74,148.35 187.325,148.35 ; C15.2@187.96,157.48 186.735,156.255 R68.2@186.735,150.495 187.325,149.905 187.325,148.35 ; R99.2@211.455,232.455 M18.2@213.315,232.455 ; M18.2@213.36,232.09 213.36,239.395
  Bottom Layer w0.7: R210.2@189.23,234.995 R85.2@193.04,234.995 196.805,234.995 196.85,235.04 196.85,239.395 ; D8.1@196.895,235.63 R96.2@200.025,235.63 R97.2@203.2,235.63 ; DA4.4@249.555,224.79 249.555,226.695
  Bottom Layer w1: M3.2@249.24,228.6 249.24,227.01 249.555,226.695 v4(255.27,226.695)
  Bottom Layer w1.5: v4(255.27,226.695) 255.27,227.33 ; v4(255.27,227.965) 255.27,227.33 ; X21.2@261.62,227.33 255.27,227.33
  Bottom Layer w2: 170.815,212.09 170.815,234.95 175.26,239.395 ; 171.45,212.09 X20.1@175.26,212.09 ; X19.2@175.26,233.045 175.26,239.395 ; C15.2@187.96,157.48 190.5,157.48 201.295,146.685 201.295,126.365 243.84,126.365 247.015,123.19 X13.3@247.015,116.205 ; X9.1@191.135,116.205 191.135,120.015 221.615,120.015 ; X12.1@221.615,116.205 221.615,120.015 ; 247.015,120.015 221.615,120.015 ; 259.08,111.76 262.89,111.76 266.065,114.935 266.065,213.36 ; X27.2@260.35,213.36 X26.2@262.89,213.36 266.065,213.36 ; v2(260.985,219.075) 266.065,219.075 ; X21.2@261.62,227.33 266.065,227.33 ; 175.26,239.395 196.85,239.395 213.36,239.395 266.065,239.395 266.065,227.33 ; 266.065,213.36 266.065,219.075 ; 266.065,219.075 266.065,227.33
  Bottom Layer w3: X13.3@247.015,116.205 247.015,115.57 250.825,111.76 259.08,111.76 X18.-@259.08,114.785
  other v1: 237.175,214.63
  other v2: 262.255,219.075
  other v4: 231.14,224.155
HVGND_B2: C24.2 C25.2 DD1.3 DD1.17 DD1.18 DD1.29 DD1.39 DD1.45 DD1.46 DD1.53 DD1.54 DD1.58 DD1.59 DD1.61 DD1.62 DD1.63 DD1.64 DD1.65 M20.2 M21.2 R14.2 R126.2 R127.2 X2.2 X3.2 X28.2 X29.2 | length 259.1
  Top Layer w0.6: DD1.45@365.89,144.43 DD1.46@365.89,143.43 371.332,143.43 ; DD1.39@365.89,150.43 371.325,150.43 ; 371.39,134.43 371.39,152.315 374.89,155.815 DD1.29@374.89,158.43 ; X3.2@375.285,128.905 376.89,130.51 DD1.59@376.89,134.43 ; v2@375.89,132.077 DD1.58@375.89,134.43 ; DD1.61@378.89,134.43 378.89,130.38 X3.2@379.89,129.38 ; DD1.62@379.89,134.43 X3.2@379.89,129.38 ; DD1.63@380.89,134.43 380.89,129.43 X3.2@380.365,128.905 ; 381.89,130.43 DD1.64@381.89,134.43 ; DD1.65@382.89,134.43 382.89,130.795 381,128.905 X3.2@380.365,128.905 ; v1(387.445,140.43) DD1.3@389.89,140.43 ; DD1.17@389.89,154.43 v1(389.89,154.94) ; X3.2@379.89,129.38 X3.2@380.365,128.905
  Top Layer w0.7: DD1.18@385.89,158.43 v1(386.715,158.43)
  Top Layer w1: 371.39,134.43 371.39,132.165 371.478,132.077 375.89,132.077 v2(376.36,132.077)
  Top Layer w1.6: X3.2@375.285,128.905 X3.2@375.285,123.825 X3.2@380.365,123.825 X3.2@380.365,128.905
  Top Layer w2: C24.2@363.855,180.34 C25.2@379.095,180.34 ; X29.2@384.175,213.36 X28.2@386.715,213.36
  Bottom Layer w0.5: R14.2@386.715,145.48 389.825,145.48 389.89,145.415 ; X2.2@387.35,128.905 387.35,132.08
  Bottom Layer w0.6: v1(387.445,140.43) 389.795,140.43
  Bottom Layer w0.7: M21.2@357.825,185.42 357.825,181.29 358.775,180.34 C24.2@363.855,180.34 367.62,180.34 ; R126.2@367.62,178.525 367.62,180.34 ; M20.2@370.205,178.115 370.205,179.705 369.57,180.34 367.62,180.34 ; v1(386.715,158.43) 389.575,158.43
  Bottom Layer w2: v2@376.363,132.08 v2(382.27,132.08) 387.35,132.08 389.89,134.62 389.89,145.415 v1(389.89,154.94) 389.89,180.34 ; C25.2@379.095,180.34 389.89,180.34 ; X29.2@384.175,213.36 X28.2@386.715,213.36 388.62,213.36 389.89,212.09 389.89,180.34
  other v2: 379.73,132.08 381,132.08
KB_C0: DD2.59 R39.1 SW1.C1 | length 81.5
  Top Layer w0.3: SW1.C1@295.91,229.235 301.625,229.235 302.895,227.965 302.895,194.31 305.69,191.515 DD2.59@314.065,191.515
  Bottom Layer w0.3: SW1.C1@295.91,229.235 299.72,229.235 300.355,228.6 300.355,210.185 297.815,207.645 R39.1@296.545,207.645
KB_C1: DD2.60 R38.1 SW1.C2 | length 72.9
  Top Layer w0.3: SW1.C2@295.91,226.695 300.99,226.695 302.26,225.425 302.26,193.675 304.92,191.015 DD2.60@314.065,191.015
  Bottom Layer w0.3: SW1.C2@295.91,226.695 299.085,226.695 299.72,226.06 299.72,212.725 297.815,210.82 R38.1@296.545,210.82
KB_C2: DD2.61 R37.1 SW1.C3 | length 64.3
  Top Layer w0.3: SW1.C3@295.91,224.155 300.355,224.155 301.625,222.885 301.625,193.04 304.15,190.515 DD2.61@314.065,190.515
  Bottom Layer w0.3: SW1.C3@295.91,224.155 298.45,224.155 299.085,223.52 299.085,215.265 297.815,213.995 R37.1@296.545,213.995
KB_C3: DD2.62 R35.1 SW1.C4 | length 51.4
  Top Layer w0.3: SW1.C4@295.91,221.615 299.72,221.615 300.99,220.345 300.99,192.405 303.38,190.015 DD2.62@314.065,190.015
  Bottom Layer w0.3: R35.1@296.545,217.17 SW1.C4@296.545,220.98
KB_R0: DD2.63 SW1.R1 | length 72.4
  Top Layer w0.3: v1(299.085,204.47) 300.355,203.2 300.355,191.77 302.61,189.515 DD2.63@314.065,189.515
  Bottom Layer w0.3: SW1.R1@295.91,239.395 299.72,239.395 304.165,234.95 304.165,207.01 302.895,205.74 299.72,205.74 299.085,205.105 v1(299.085,204.47)
KB_R1: DD2.64 SW1.R2 | length 72.2
  Top Layer w0.3: v1(297.18,203.835) 299.72,201.295 299.72,191.135 301.84,189.015 DD2.64@314.065,189.015
  Bottom Layer w0.3: SW1.R2@295.91,236.855 299.085,236.855 303.53,232.41 303.53,207.082 302.823,206.375 298.45,206.375 297.18,205.105 v1(297.18,203.835)
KB_R2: DD2.57 SW1.R3 | length 57.4
  Top Layer w0.3: SW1.R3@295.91,234.315 302.895,234.315 304.165,233.045 304.165,195.58 307.23,192.515 DD2.57@314.065,192.515
KB_R3: DD2.58 SW1.R4 | length 55.5
  Top Layer w0.3: SW1.R4@295.91,231.775 302.26,231.775 303.53,230.505 303.53,194.945 306.46,192.015 DD2.58@314.065,192.015
LCD_DB4: DD2.15 LCD1.DB4 | length 67.9
  Top Layer w0.3: DD2.15@329.565,190.515 334.909,190.515 374.015,229.621 LCD1.DB4@374.015,236.855
LCD_DB5: DD2.16 LCD1.DB5 | length 66.1
  Top Layer w0.3: DD2.16@329.565,191.015 334.453,191.015 371.475,228.037 LCD1.DB5@371.475,236.855
LCD_DB6: DD2.17 LCD1.DB6 | length 64.2
  Top Layer w0.3: DD2.17@329.565,191.515 333.962,191.515 368.935,226.488 LCD1.DB6@368.935,236.855
LCD_DB7: DD2.18 LCD1.DB7 | length 62.4
  Top Layer w0.3: DD2.18@329.565,192.015 333.548,192.015 366.395,224.862 LCD1.DB7@366.395,236.855
LCD_E: DD2.4 LCD1.E R8.1 | length 79.1
  Top Layer w0.3: DD2.4@329.565,185.015 334.165,185.015 376.555,227.405 LCD1.E@376.555,236.855
  Bottom Layer w0.3: R8.1@376.555,231.775 LCD1.E@376.555,236.855
LCD_LED_ON: DD2.5 M1.1 R12.1 | length 93.8
  Top Layer w0.3: DD2.5@329.565,185.515 332.835,185.515 374.015,226.695 v1(374.015,227.33)
  Bottom Layer w0.3: M1.1@354.015,234.95 353.06,234.95 352.425,234.315 352.425,229.87 354.965,227.33 v1(374.015,227.33)
  Bottom Layer w0.5: M1.1@354.015,234.95 354.015,237.175 R12.1@354.33,237.49
LCD_RS: DD2.2 LCD1.RS | length 77.7
  Top Layer w0.3: DD2.2@329.565,184.015 335.145,184.015 381.635,230.505 LCD1.RS@381.635,236.855
LCD_RW: DD2.3 LCD1.RW | length 75.8
  Top Layer w0.3: DD2.3@329.565,184.515 334.654,184.515 379.095,228.956 LCD1.RW@379.095,236.855
MCU_AMP_IN: DA16.5 DD2.29 | length 38.4
  Top Layer w0.3: DD2.29@326.315,197.265 v1@326.315,206.935
  Top Layer w0.5: v1(323.215,220.345) v1(323.215,227.965)
  Bottom Layer w0.3: v1(323.215,220.345) 323.215,217.17 326.39,213.995 v1(326.39,207.01)
  Bottom Layer w0.5: v1(323.215,227.965) 321.945,229.235 321.945,231.775 322.58,232.41 DA16.5@323.85,232.41
MCU_SOUND: DA13.2 DA13.3 DA16.1 DA16.2 | length 20.1
  Top Layer w0.5: DA13.3@336.55,224.155 v1(336.55,225.425)
  Bottom Layer w0.5: DA16.1@323.85,237.49 DA16.2@323.85,236.22 326.39,236.22 336.55,226.06 v1(336.55,225.425)
MIC_AMP: C43.2 DA16.14 R204.1 | length 3
  Bottom Layer w0.5: R204.1@315.595,238.125 317.715,238.125 v1(318.35,237.49)
MIC_OUT: DA16.8 DD2.34 R192.1 | length 39.6
  Top Layer w0.3: v1(320.675,212.725) 320.675,207.01 322.58,205.105 322.58,203.165 323.815,201.93 DD2.34@323.815,197.265
  Top Layer w0.5: v1(316.23,229.235) 319.405,229.235 320.675,227.965 v1(320.675,220.345)
  Bottom Layer w0.3: v1(320.675,212.725) v1(320.675,220.345)
  Bottom Layer w0.5: v1(316.23,229.235) 318.135,229.235 318.35,229.45 DA16.8@318.35,229.87
NetC7_2: C7.2 DD2.14 | length 2.6
  Top Layer w0.3: v1(327.102,189.628) 327.489,190.015 DD2.14@329.565,190.015
NetC13_1: C13.1 D1.2 DA1.in DA4.2 | length 30.9
  Top Layer w0.5: 238.566,228.9 238.566,226.889 242.842,222.613 248.552,222.613 v1(250.505,220.66)
  Top Layer w1: DA1.in@227.33,228.715 233.495,228.715 C13.1@233.68,228.9 238.566,228.9 D1.2@239.536,229.87
  Bottom Layer w0.5: v1(250.505,220.66) DA4.2@250.505,222.39
NetC22_2: C22.2 DA5.12 R52.2 R53.2 R55.2 | length 10.6
  Top Layer w0.5: DA5.12@189.015,175.895 189.865,175.895 190.545,176.575 R53.2@191.77,176.575 ; R55.2@191.77,179.07 R53.2@191.77,176.575 ; R52.2@196.85,176.575 C22.2@194.31,176.575 R53.2@191.77,176.575
NetC28_2: C28.2 DA11.10 R140.1 | length 25.5
  Top Layer w0.5: DA11.10@215.685,210.185 217.17,210.185 217.805,210.82 217.805,212.09 218.44,212.725 v1(219.71,212.725) ; v1(227.965,212.725) C28.2@236.81,212.725 ; C28.2@236.855,212.68 236.9,212.725 R140.1@239.395,212.725
  Bottom Layer w0.5: v1(219.71,212.725) v1(227.965,212.725)
NetC33_1: C33.1 DA13.15 | length 9.9
  Top Layer w0.5: DA13.15@342.05,225.425 344.17,225.425 346.075,227.33 C33.1@346.075,232.41
NetC33_2: C33.2 R185.2 | length 2.5
  Top Layer w0.5: R185.2@343.535,234.405 C33.2@346.03,234.405
NetC36_1: C36.1 DA14.4 DA14.5 | length 5.1
  Bottom Layer w0.5: DA14.5@340.995,233.68 DA14.4@340.995,234.95 C36.1@344.805,234.95
NetC37_2: C37.2 R186.2 R188.1 | length 4.4
  Bottom Layer w0.5: R188.1@381,153.67 C37.2@382.86,153.67 ; R186.2@381.045,151.13 R188.1@381.045,153.625
NetC39_1: C39.1 R190.1 | length 2.5
  Top Layer w0.5: R190.1@326.39,220.345 C39.1@328.93,220.345
NetC43_1: C43.1 R193.1 | length 2.5
  Top Layer w0.5: R193.1@318.77,233.045 C43.1@318.77,235.585
NetC44_1: C44.1 DA16.13 R204.2 | length 6.4
  Bottom Layer w0.5: C44.1@312.42,234.95 314.37,234.95 R204.2@315.595,236.175 DA16.13@318.305,236.175
NetC44_2: C44.2 MIC1.- R206.1 | length 5.1
  Bottom Layer w0.5: R206.1@307.975,234.95 309.88,234.95 MIC1.-@309.88,238.125
NetC45_2: C45.2 DA16.3 R200.2 | length 4
  Bottom Layer w0.5: DA16.3@323.85,234.95 325.755,234.95 326.39,234.315 v1(326.39,233.09)
NetD1_1: D1.1 L1.1 M3.3 | length 12.5
  Top Layer w1: L1.1@243.84,224.79 D1.1@243.84,229.866
  Bottom Layer w1: v4(244.467,229.87) 247.015,229.87 248.045,230.9 M3.3@250.19,230.9
  Bottom Layer w1.5: v4@243.205,229.87 v4(244.467,229.87)
  other v4: 243.197,229.87
NetD5_1: D5.1 M10.3 | length 4.5
  Bottom Layer w0.7: 179.07,220.331 D5.1@179.07,224.79
  other v1: 179.292,217.049 183.116,217.031 181.214,218.467 183.023,220.015 179.367,220.034
NetD7_1: D7.1 M17.3 | length 9.3
  Top Layer w1: M17.3@211.85,231.14 216.535,231.14 219.075,233.68 D7.1@219.075,234.664
NetD8_2: D8.2 R93.2 R95.1 | length 5.1
  Bottom Layer w0.5: R93.2@196.805,228.6 196.85,228.645 D8.2@196.85,231.24 R95.1@199.29,231.24
NetD9_1: D9.1 DA7.13 R76.1 R79.2 | length 7.4
  Top Layer w0.5: DA7.13@211.875,183.515 v1(212.09,183.515) 213.36,183.515 R76.1@213.995,184.15 R79.2@216.49,184.15
  Bottom Layer w0.5: D9.1@210.185,181.925 211.775,183.515 v1(212.09,183.515)
NetD9_2: D9.2 DA7.9 R105.1 R113.2 | length 12.2
  Top Layer w0.5: DA7.9@211.875,178.435 v1(212.09,178.435) 213.995,178.435 ; R113.2@214.04,175.26 214.04,178.39 213.995,178.435 ; R105.1@216.535,175.895 216.535,177.165 215.265,178.435 213.995,178.435
  Bottom Layer w0.5: D9.2@210.185,180.025 211.775,178.435 v1(212.09,178.435)
NetD10_1: D10.1 DA12.6 R174.1 R176.2 | length 13.1
  Top Layer w0.5: D10.1@241.935,179.385 241.935,180.975 243.205,182.245 R174.1@245.745,182.245 ; R176.2@245.745,184.105 R174.1@245.745,182.245 ; DA12.6@248.5,182.245 R174.1@245.745,182.245 ; DA12.6@249.135,182.245 250.825,182.245 251.46,181.61
NetD10_2: D10.2 DA12.2 R172.1 R173.2 | length 21.4
  Top Layer w0.5: D10.2@241.935,177.485 241.935,176.53 v1(249.555,176.53) ; v1(252.73,178.435) 252.73,180.975 DA12.2@254.635,180.975 R172.1@257.175,180.975 R173.2@257.175,182.835
  Bottom Layer w0.5: v1(249.555,176.53) 250.825,176.53 v1(252.73,178.435)
NetDA4_5: DA4.5 M3.1 | length 3.9
  Top Layer w0.7: v1(251.14,228.6) 251.46,228.28 v1(251.46,224.79)
NetDA5_3: DA5.3 R46.2 R49.1 | length 5.3
  Bottom Layer w0.5: R46.2@181.61,176.485 181.61,175.895 v1(183.515,175.895) 184.778,175.895 185.42,176.537 R49.1@185.42,177.165
NetDA5_5: DA5.5 R102.2 R108.1 | length 5.3
  Top Layer w0.5: R108.1@180.975,170.18 R102.2@180.975,172.675 ; R102.2@181.02,172.72 181.655,173.355 DA5.5@183.515,173.355